# EAGLE board release (EAGLE 9.0.1)
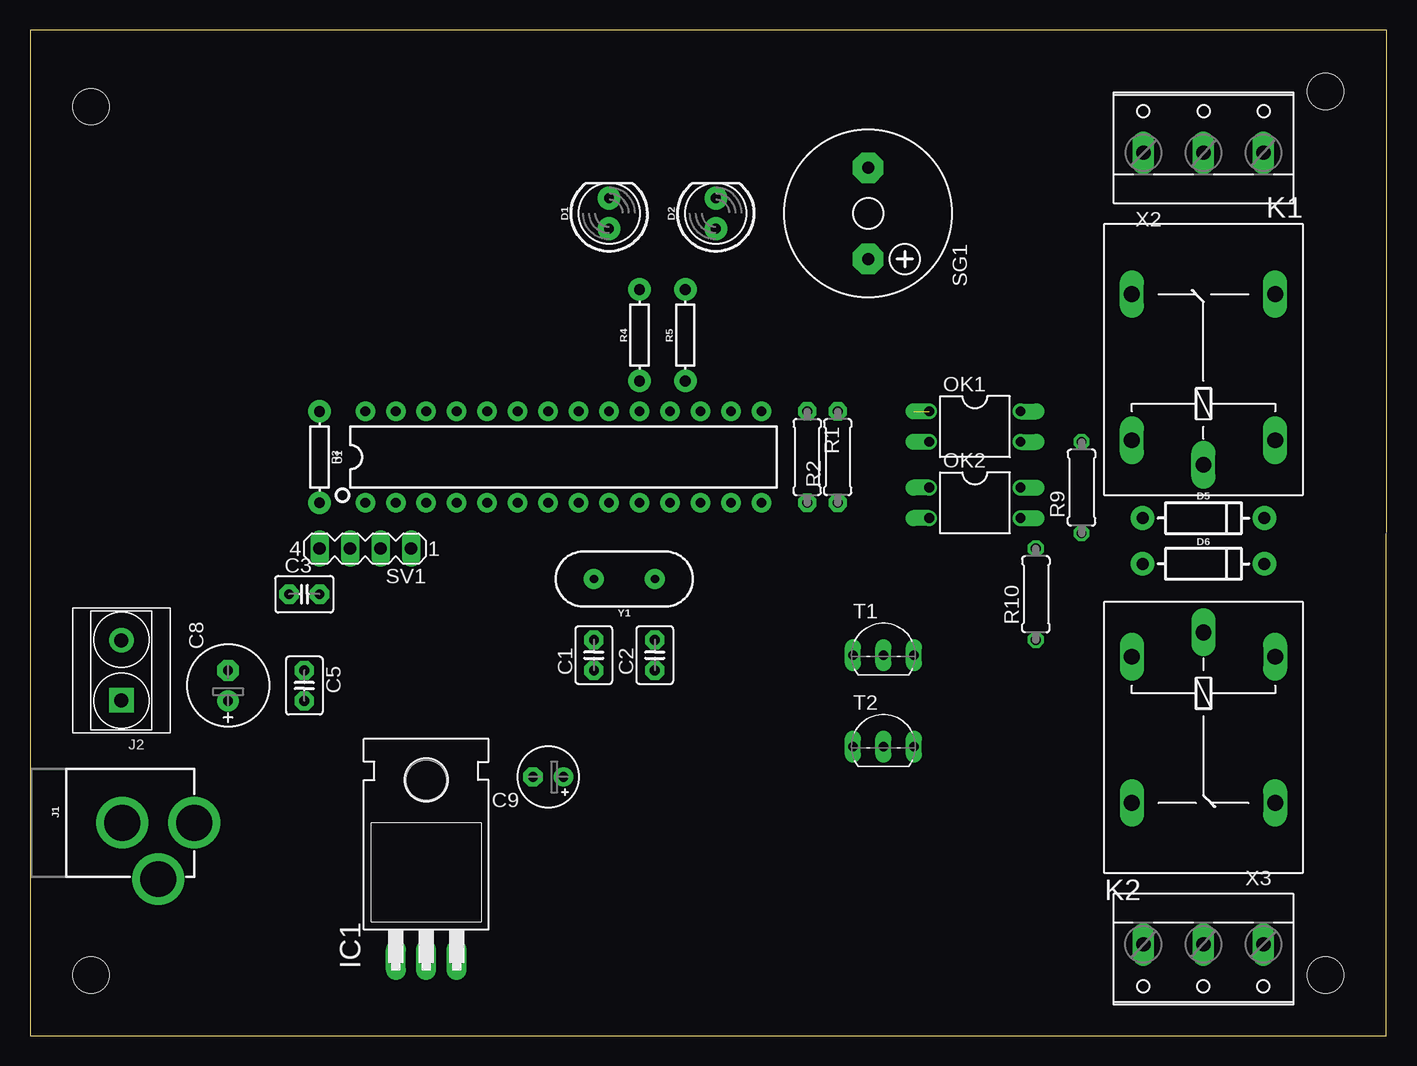
[diagram p0: board, top side]
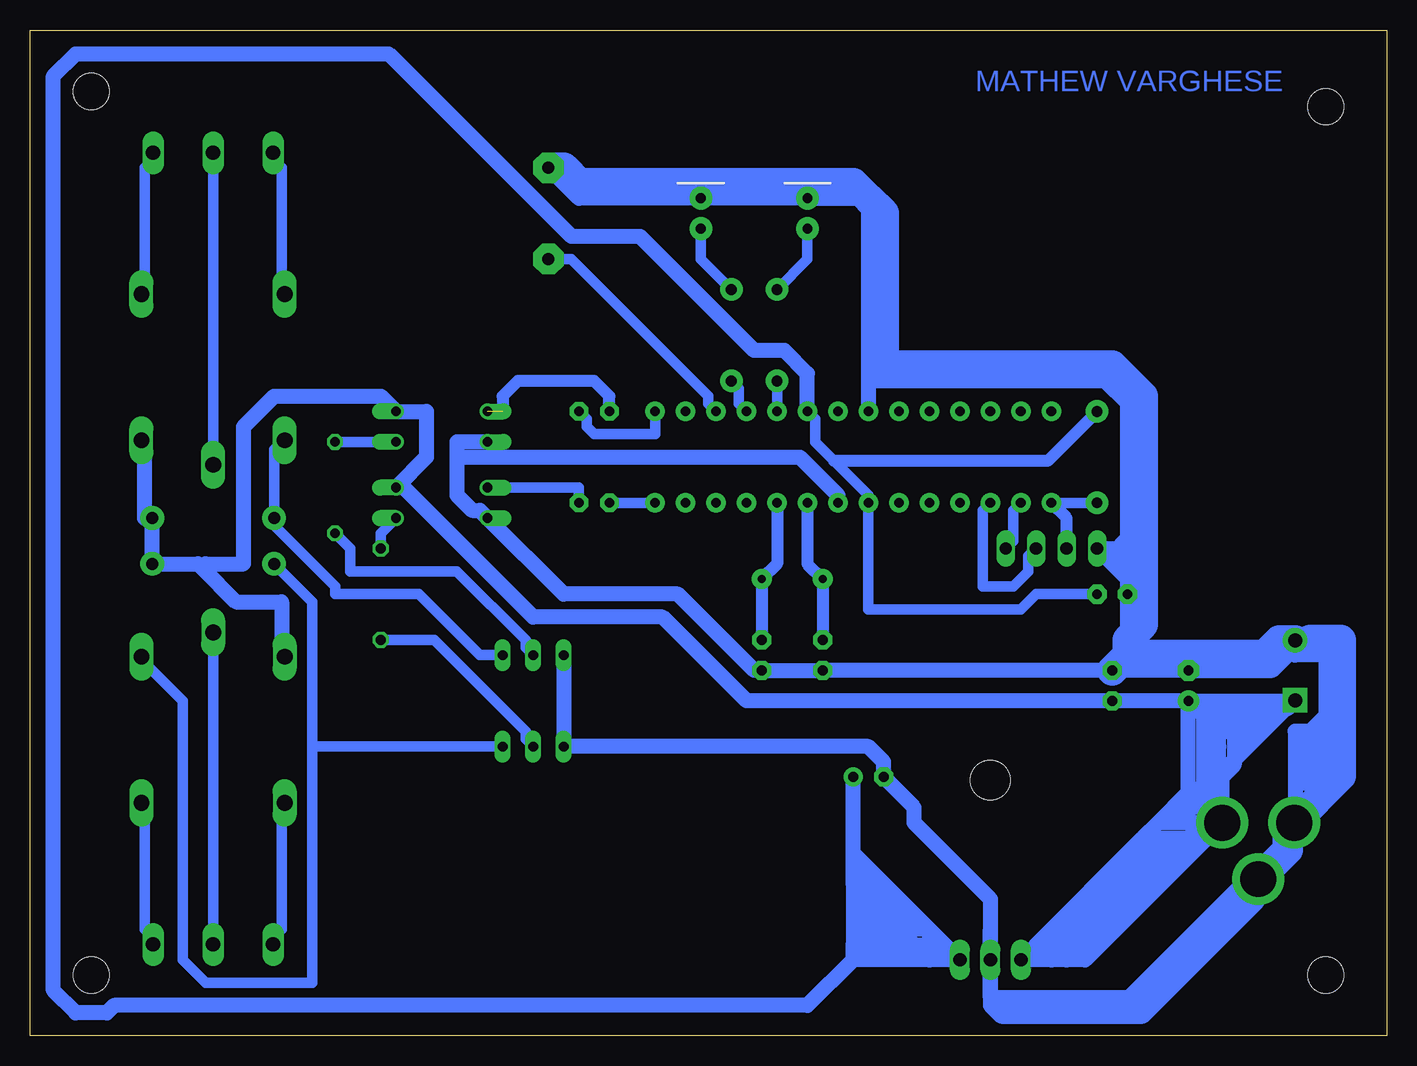
[diagram p1: board, bottom side, seen from below]

Size 113.05 x 83.87 mm. Coordinates in mm from the lower left corner, seen from the top.
Outline: 0,0 113.01,0 113.05,83.87 0,83.87 0,0
Copper layers (1*16): Top 0.035mm / dielectric 1.5mm / Bottom 0.035mm
Design rules "default *": minimum track width 50mil, minimum drill 0.35mm, track to track 25mil, track to pad 25mil, pad to pad 25mil, via to via 6mil, smd to smd 6mil, copper to edge 40mil, drill to drill 6mil, minimum pad ring 10mil, minimum via ring 8mil, stop-mask expansion 4mil, vias tented up to drill 0mil, thermal gap 10mil
Holes 3 mm at 5.08,77.47 5.08,77.47 107.95,78.74 107.95,5.08 5.08,5.08

## Footprints (pad centres in the part's own frame; a part is rotated, then mirrored left to right if it is on the bottom)
C2.5-3 = drill 0.813 pad 1.6 octagon: 1 -1.27,0; 2 1.27,0
E2,5-7 = drill 0.813 pad 1.778: + -1.27,0 | drill 0.813 pad 1.778 octagon: - 1.27,0
E2,5-5 = drill 0.813 pad 1.6: + -1.27,0 | drill 0.813 pad 1.6 octagon: - 1.27,0
LED_5MM = drill 0.813 pad 1.88: A -1.27,0; K 1.27,0
DIODE-1N4001 = drill 1 pad 1.981: A -5.08,0; C 5.08,0
TO220H = drill 1.118 long: 1 -2.54,-10.16; 2 0,-10.16; 3 2.54,-10.16 | hole 3.302: 0,4.826
POWER_JACK_PTH = drill 2.997 pad 4.318: GND 0,7.7; GNDBREAK 4.7,10.7; PWR 0,13.7
H2-5.0-10.5X8.0MM = drill 1.168 pad 2.032 square: 1 0,2.5 | drill 1.168 pad 2.032: 2 0,-2.5
G5LE = drill 1.321 long: 1 -7.493,-5.969; 2 -7.493,5.969; O 4.699,5.969; P -9.525,0; S 4.699,-5.969
DIL04 = drill 0.813 offset: 1 -1.27,-3.81; 2 1.27,-3.81; 3 1.27,3.81; 4 -1.27,3.81
0207/7 = drill 0.8 pad 1.524 octagon: 1 -3.81,0; 2 3.81,0
AXIAL-0.3 = drill 0.9 pad 1.88: P$1 -3.81,0; P$2 3.81,0
0207/7' = drill 0.813 octagon: 1 -3.81,0; 2 3.81,0
F/CM12P = drill 1.016 pad 2.54 octagon: + 3.81,0; - -3.81,0
MA04-1 = drill 1.016 long: 1 -3.81,0; 2 -1.27,0; 3 1.27,0; 4 3.81,0
TO92-EBC-OVAL = drill 0.813 long: B 0,-1.27; C 2.54,-1.27; E -2.54,-1.27
DIP28 = drill 0.813 pad 1.626: 1 -16.51,-3.81; 2 -13.97,-3.81; 3 -11.43,-3.81; 4 -8.89,-3.81; 5 -6.35,-3.81; 6 -3.81,-3.81; 7 -1.27,-3.81; 8 1.27,-3.81; 9 3.81,-3.81; 10 6.35,-3.81; 11 8.89,-3.81; 12 11.43,-3.81; 13 13.97,-3.81; 14 16.51,-3.81; 15 16.51,3.81; 16 13.97,3.81; 17 11.43,3.81; 18 8.89,3.81; 19 6.35,3.81; 20 3.81,3.81; 21 1.27,3.81; 22 -1.27,3.81; 23 -3.81,3.81; 24 -6.35,3.81; 25 -8.89,3.81; 26 -11.43,3.81; 27 -13.97,3.81; 28 -16.51,3.81
W237-103 = drill 1.194 long: 1 -5,-1.29; 2 0,-1.29; 3 5,-1.29
HC49US = drill 0.7 pad 1.651: 1 -2.54,0; 2 2.54,0

## Placement (x,y rotation side)
C1  18pf  [C2.5-3]  46.99,31.75 90 top
C2  18pf  [C2.5-3]  52.07,31.75 90 top
C3  0.1u  [C2.5-3]  22.86,36.83 0 top
C5  0.1u  [C2.5-3]  22.86,29.21 270 top
C8  100u  [E2,5-7]  16.51,29.21 90 top
C9  10u  [E2,5-5]  43.18,21.59 180 top
D1  [LED_5MM]  48.26,68.58 90 top
D2  [LED_5MM]  57.15,68.58 90 top
D5  1A/50V/1.1V  [DIODE-1N4001]  97.79,43.18 0 top
D6  1A/50V/1.1V  [DIODE-1N4001]  97.79,39.37 0 top
IC1  7805T  [TO220H]  33.02,16.51 0 top
J1  POWER_JACK  [POWER_JACK_PTH]  0,17.78 270 top
J2  GREEN-2P-5.0  [H2-5.0-10.5X8.0MM]  7.62,30.48 180 top
K1  G5L  [G5LE]  97.79,57.15 90 top
K2  G5L  [G5LE]  97.79,24.13 270 top
OK1  LTV816  [DIL04]  78.74,50.8 270 top
OK2  LTV816  [DIL04]  78.74,44.45 270 top
R1  330  [0207/7]  64.77,48.26 270 top
R2  330  [0207/7]  67.31,48.26 90 top
R3  10K  [AXIAL-0.3]  24.13,48.26 270 top
R4  [AXIAL-0.3]  50.8,58.42 90 top
R5  [AXIAL-0.3]  54.61,58.42 90 top
R9  1k  [0207/7']  87.63,45.72 90 top
R10  1k  [0207/7']  83.82,36.83 90 top
SG1  F/CM12P  [F/CM12P]  69.85,68.58 270 top
SV1  [MA04-1]  27.94,40.64 180 top
T1  2N2222  [TO92-EBC-OVAL]  71.12,33.02 0 top
T2  2N2222  [TO92-EBC-OVAL]  71.12,25.4 0 top
U1  328P  [DIP28]  44.45,48.26 0 top
X2  [W237-103]  97.79,74.93 0 top
X3  [W237-103]  97.79,6.35 180 top
Y1  16MHz  [HC49US]  49.53,38.1 180 top

## Library data of the parts
C1-C3 C5 = capacitor-wima
C8 C9 IC1 T1 T2 = adafruit
D1 D2 = SparkFun-LED
D5 D6 = SparkFun-DiscreteSemi; PROD_ID: DIO-09176
J1 = SparkFun-Connectors; PROD_ID: CONN-08197
J2 = Seeed-Connector
K1 K2 = relay; OC_FARNELL: unknown; OC_NEWARK: unknown
OK1 OK2 = optocoupler; OC_FARNELL: unknown; OC_NEWARK: unknown
R1 R2 = Clean-Kong
R3 = SparkFun-Resistors; PROD_ID: RES-08380
R4 R5 = SparkFun-Resistors
R9 R10 = resistor
SG1 = buzzer; OC_FARNELL: unknown; OC_NEWARK: unknown
SV1 = con-lstb; OC_FARNELL: unknown; OC_NEWARK: unknown
U1 = SparkFun-IC-Microcontroller; PROD_ID: IC-09136
X2 X3 = con-wago-500; MPN: 237-103; OC_FARNELL: unknown; OC_NEWARK: 18M7116
Y1 = SparkFun-Clocks; PROD_ID: XTAL-08181; SF_ID: COM-00536

## Nets
5V: C3.2 C9.+ IC1.3 R3.P$1 U1.7 U1.20
12V: C5.2 C8.+ D5.C D6.C IC1.1 J1.PWR J2.1 K1.1 K2.1 OK1.4 OK2.4
BUZ: SG1.+ U1.17
GND: C1.1 C2.1 C3.1 C5.1 C8.- C9.- D1.K D2.K IC1.2 J1.GND J1.GNDBREAK J2.2 OK1.2 OK2.2 SG1.- SV1.4 T1.E T2.E U1.8 U1.22
L1: R4.P$1 U1.19
L2: R5.P$1 U1.18
N$1: C1.2 U1.9 Y1.2
N$2: C2.2 U1.10 Y1.1
N$3: OK1.1 R1.1
N$4: OK2.1 R2.1
N$6: R9.1 T1.B
N$7: D1.A R4.P$2
N$8: D2.A R5.P$2
N$18: K1.S X2.3
N$21: K1.O X2.1
N$22: K1.P X2.2
N$23: D5.A K1.2 T1.C
N$26: R10.1 T2.B
N$27: K2.S X3.3
N$28: K2.O X3.1
N$29: K2.P X3.2
N$30: D6.A K2.2 T2.C
OUT1: OK1.3 R9.2
OUT2: OK2.3 R10.2
RESET: R3.P$2 SV1.3 U1.1
RL1: R1.2 U1.14
RL2: R2.2 U1.15
RX: SV1.1 U1.2
SCL: U1.28
SDA: U1.27
TX: SV1.2 U1.3

## Tracks (layer width: path | path; a pad name or v marks a point on that pad's centre or on a via)
5V
  Bottom 0.889: C3.2 29.21,36.83 30.48,35.56 43.18,35.56 U1.7 43.18,45.09 46.04,47.94 47.62,49.53 47.62,51.44 U1.20
  Bottom 1.016: R3.P$1 28.26,47.94 46.04,47.94
  Bottom 1.27: 44.45,6.35 44.45,7.62 | 44.45,12.7 44.45,13.97 | 44.45,13.97 44.45,15.24 | 44.45,15.24 C9.+ | 38.1,6.35 IC1.3 36.83,7.62 | 38.1,6.35 44.45,6.35 | 44.45,6.35 48.26,2.54 106.03,2.54 106.64,1.93 109.25,1.93 111.1,3.77 111.1,80.05 109.25,81.89 83.16,81.89 67.94,66.67 62.23,66.67 52.7,57.15 50.16,57.15 48.26,55.24 U1.20 | 43.18,13.97 44.45,15.24 | 36.83,7.62 38.1,8.89 | 43.18,13.97 44.45,13.97 | 43.18,13.97 38.1,8.89 | 38.1,8.89 38.1,7.62 | 38.1,7.62 38.1,6.35 | 36.83,7.62 38.1,7.62 | 39.37,7.62 43.18,7.62 | 43.18,7.62 44.45,7.62 | 43.18,13.97 43.81,13.34 | 43.81,13.34 44.45,12.7 | 44.45,12.7 44.45,7.62 | 43.81,13.34 43.81,8.89 | 43.81,8.89 43.81,8.26 43.18,7.62 | 43.81,8.89 43.18,8.89 | 43.18,8.89 40.64,8.89 | 39.37,8.89 40.64,8.89 | 39.37,8.89 43.18,12.7 43.18,11.43 | 43.18,8.89 43.18,11.43 | 41.91,10.16 43.18,8.89 | 43.18,11.43 41.91,10.16 | 40.64,8.89 41.91,10.16 | 40.64,8.89 39.37,7.62 | 39.37,7.62 38.1,7.62 | 38.1,8.89 39.37,8.89
12V
  Bottom 1.27: 98.74,39.05 99.06,39.37 D6.C D5.C 103.5,43.18 103.5,49.53 K1.1 | 98.74,39.05 95.89,36.2 92.08,36.2 92.08,31.75 K2.1 | 98.74,39.05 98.42,39.37 95.25,39.37 95.25,50.8 92.71,53.34 83.82,53.34 OK1.4 80.01,52.07 80.01,48.26 OK2.4 81.92,45.72 71.12,34.92 60.33,34.92 53.34,27.94 C5.2 C8.+ | C8.+ 7.62,27.94 | 7.62,27.94 J2.1 8.29,27.3 | 19.05,17.78 20.32,16.51 | J1.PWR 15.24,17.78 | 15.24,17.78 16.51,17.78 | 16.51,17.78 17.78,17.78 | 17.78,17.78 19.05,17.78 | 16.51,17.78 16.51,19.05 | 16.51,19.05 16.51,20.59 | 14.97,19.05 16.51,20.59 | 16.51,20.59 C8.+ | J1.PWR 14.97,19.05 | 14.97,19.05 16.51,19.05 | 8.29,27.3 8.26,27.3 7.62,27.94 | J1.PWR 13.7,22.01 11.51,24.21 | 11.51,24.21 10.87,24.84 | 10.87,24.84 9.04,26.67 | 8.29,27.3 8.41,27.3 9.04,26.67 | 15.24,26.67 13.97,26.67 | 13.97,26.67 12.7,26.67 | 12.7,26.67 10.16,26.67 | 10.16,26.67 9.04,26.67 | C8.+ 15.24,26.67 | 16.51,20.59 15.51,20.59 15.24,20.32 15.24,26.67 | J1.PWR 13.97,18.05 13.97,24.13 | 13.97,24.13 13.97,25.4 | 13.97,25.4 13.97,26.67 | 13.97,24.13 14.97,23.13 14.97,20.32 | 14.97,20.32 14.97,19.05 | 14.97,20.32 12.7,22.59 12.7,25.4 | 12.7,26.67 11.43,25.4 12.7,25.4 | 12.7,26.67 13.97,25.4 | 13.97,25.4 12.7,25.4 | 12.7,25.4 11.51,24.21 | 10.87,24.84 10.87,25.96 10.16,26.67 | C8.+ 16.51,20.32 19.05,17.78 | 16.51,19.05 17.78,17.78 | 26.67,6.35 25.13,6.35 J1.PWR | 26.67,6.35 27.94,6.35 | 27.94,6.35 IC1.1 29.21,7.62 | 16.51,16.51 15.24,17.78 | 26.67,6.35 22.86,10.16 | 22.86,10.16 22.23,10.79 | 22.23,10.79 20.95,12.06 | 20.95,12.06 20.32,12.7 | 20.32,12.7 19.05,13.97 | 19.05,13.97 17.78,15.24 | 16.51,16.51 17.78,15.24 | 17.78,15.24 20.32,15.24 | 22.86,12.7 27.94,7.62 29.21,7.62 | 29.21,7.62 20.32,16.51
  Bottom 1.27: 20.32,16.51 16.51,16.51 | 20.32,15.24 21.59,13.97 | 21.59,13.97 22.86,12.7 | 22.86,12.7 22.86,11.43 | 22.86,11.43 22.86,10.16 | 20.32,12.7 20.32,15.24 | 19.05,13.97 21.59,13.97 | 20.95,12.06 20.95,13.34 21.59,13.97 | 21.59,13.97 21.59,12.7 22.86,11.43 | 22.23,10.79 23.5,10.79 27.94,6.35
BUZ
  Bottom 0.889: U1.17 56.52,52.7 56.52,53.34 67.94,64.77 SG1.+
GND
  Bottom 1.27: T1.E T2.E 43.18,24.13 41.91,22.86 C9.- 39.37,19.05 39.37,17.78 33.02,11.43 IC1.2 | 43.18,54.61 43.18,69.85 D1.K D2.K 67.31,69.85 SG1.- | 43.18,54.61 U1.22 | 77.47,48.26 77.47,49.53 OK1.2 | 77.47,48.26 77.47,45.09 76.2,43.81 75.56,43.81 OK2.2 68.58,36.83 59.05,36.83 52.7,30.48 C2.1 C1.1 C5.1 21.59,30.48 | U1.8 45.72,45.09 48.9,48.26 77.47,48.26 | 8.26,17.78 J1.GND 7.62,17.78 7.62,25.4 6.35,25.4 5.08,26.67 5.08,31.75 7.62,31.75 7.94,32.07 | 21.59,30.48 C8.- 9.53,30.48 7.94,32.07 | 7.94,32.07 7.62,32.38 J2.2 | 21.59,30.48 21.59,31.75 C3.1 21.59,38.1 SV1.4 21.59,40.64 21.59,52.7 23.5,54.61 43.18,54.61 | IC1.2 33.02,3.17 20.32,3.17 10.79,12.7 | 10.79,12.7 J1.GNDBREAK | IC1.2 33.02,8.89 | 29.21,2.54 33.02,2.54 | 33.02,2.54 32.13,1.65 20.32,1.65 10.79,11.18 10.79,12.7 | IC1.2 33.02,2.54
  Bottom 2.54: 8.26,17.78 8.26,15.53 J1.GNDBREAK 21.24,2.54 29.21,2.54 31.75,2.54 | J1.GND 3.81,21.67 3.81,25.4 | 3.81,25.4 3.81,33.02 6.35,33.02 | 3.81,25.4 5.08,24.13 6.35,24.13 6.35,21.59 | J2.2 8.93,32.98 10.16,31.75 21.59,31.75 | 21.59,31.75 21.59,33.02 20.32,34.29 20.32,39.37 | 20.32,39.37 21.59,40.64 20.32,41.91 | 20.32,41.91 20.32,53.34 22.86,55.88 41.91,55.88 41.91,68.58 43.18,69.85 44.45,71.12 67.31,71.12 68.58,72.39 SG1.- | 20.32,39.37 20.32,41.91 | C5.1 21.59,31.75
L1
  Bottom 0.889: R4.P$1 U1.19
L2
  Bottom 0.889: U1.18 53.98,52.7 53.98,53.98 R5.P$1
N$1
  Bottom 1.016: U1.9 48.26,39.37 Y1.2 C1.2
N$2
  Bottom 1.016: U1.10 50.8,39.37 Y1.1 C2.2
N$3  (1 unrouted)
  Bottom 1.016: R1.1 64.77,53.34 66.04,54.61 72.39,54.61 73.66,53.34 73.66,52.07
N$4
  Bottom 0.889: OK2.1 67.31,45.72 R2.1
N$6
  Bottom 0.889: T1.B 71.75,32.38 71.75,33.02 77.47,38.73 86.36,38.73 86.36,40.64 R9.1
N$7
  Bottom 0.889: R4.P$2 48.26,64.77 D1.A
N$8
  Bottom 0.889: R5.P$2 57.15,64.77 D2.A
N$18
  Bottom 0.889: X2.3 102.87,73.03 103.5,72.39 103.5,62.23 K1.S
N$21
  Bottom 0.889: X2.1 92.71,73.03 92.08,72.39 92.08,62.23 K1.O
N$22
  Bottom 0.889: K1.P X2.2
N$23
  Bottom 0.889: T1.C 75.56,31.75 80.64,36.83 87.63,36.83 87.63,37.47 92.71,42.55 D5.A 92.71,48.9 92.08,49.53 K1.2
N$26
  Bottom 0.889: T2.B 71.75,24.77 71.75,25.4 79.38,33.02 R10.1
N$27
  Bottom 0.889: X3.3 92.71,8.26 92.08,8.89 92.08,19.05 K2.S
N$28
  Bottom 0.889: X3.1 102.87,8.26 103.5,8.89 103.5,19.05 K2.O
N$29
  Bottom 0.889: K2.P X3.2
N$30
  Bottom 0.889: 89.53,24.13 T2.C | 89.53,24.13 89.53,36.2 D6.A | 89.53,24.13 89.53,4.45 98.42,4.45 100.33,6.35 100.33,27.94 103.5,31.11 K2.2
OUT1
  Bottom 0.889: R9.2 OK1.3
OUT2
  Bottom 0.889: OK2.3 83.82,41.91 R10.2
RESET
  Bottom 0.889: R3.P$2 U1.1
  Bottom 1.016: SV1.3 26.67,43.18 U1.1
RL1
  Bottom 0.889: U1.14 R1.2
RL2
  Bottom 0.889: R2.2 66.67,51.44 66.67,50.8 66.04,50.16 60.96,50.16 U1.15
RX
  Bottom 0.889: SV1.1 31.11,41.27 31.11,43.81 U1.2
TX
  Bottom 0.889: SV1.2 29.84,40.01 29.84,38.73 31.11,37.47 33.66,37.47 33.66,43.81 U1.3

## Text on the board
Bottom: MATHEW VARGHESE